# Altium PCB f1_hw_tst.PcbDoc
Units mil, origin at the board's own origin, x right, y up, seen from the top; angles counter-clockwise.
Board outline 3250 x 1655 mil, 2 copper layers (Top Layer, Bottom Layer); 28 components, 40 nets, 129 pads, 4 vias.
Unrouted connection lines stored in the file: 1.
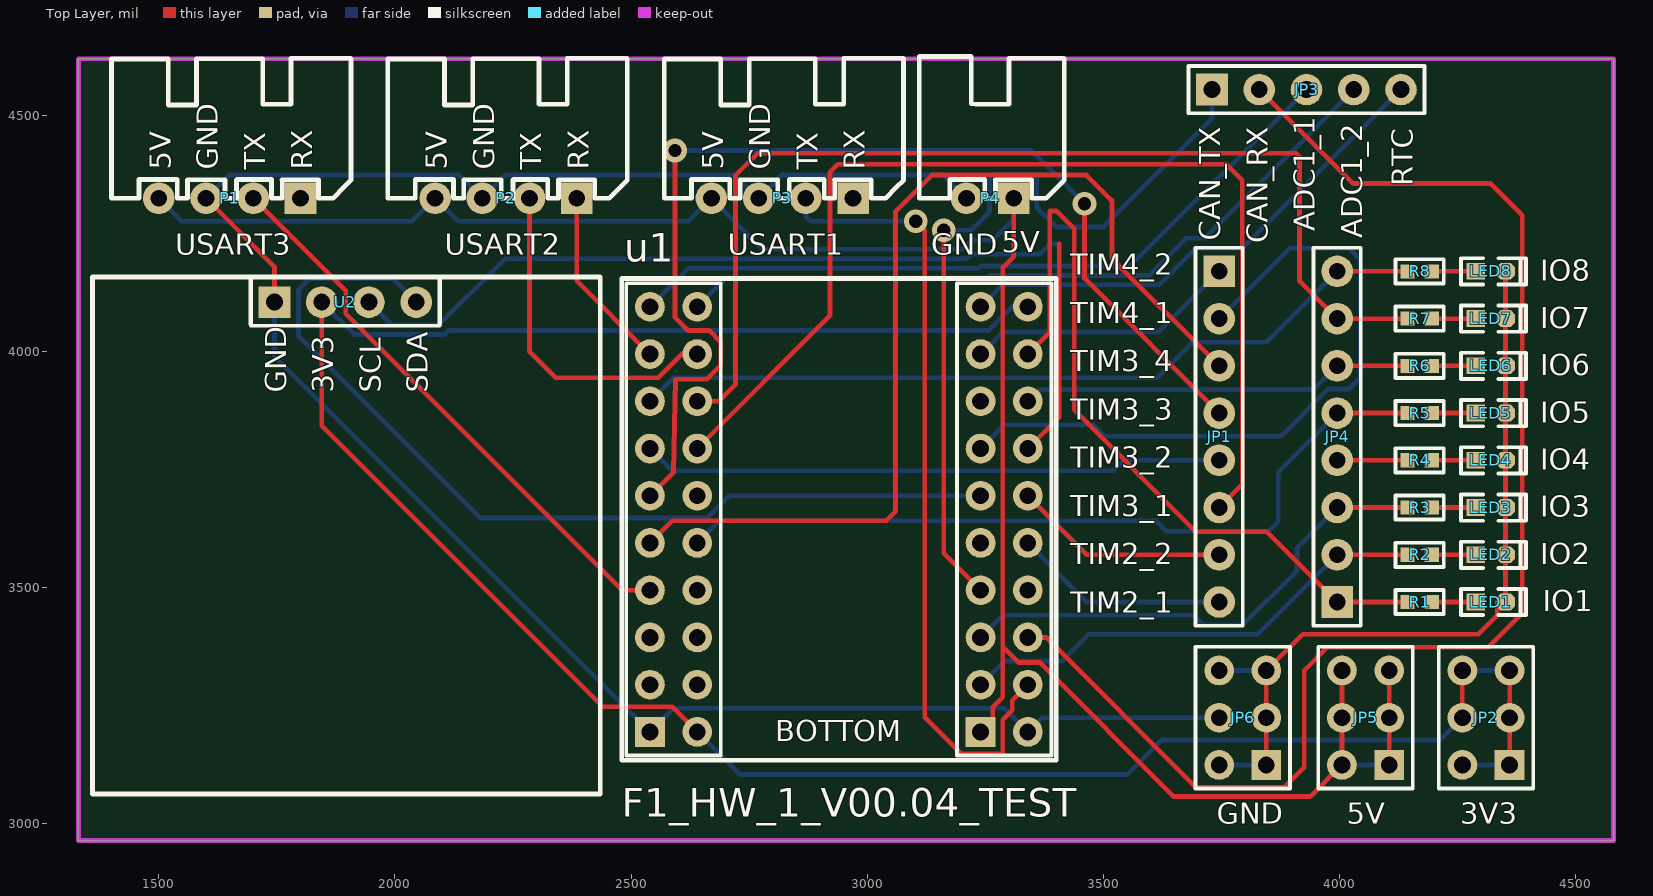
[diagram p0: Top Layer view]
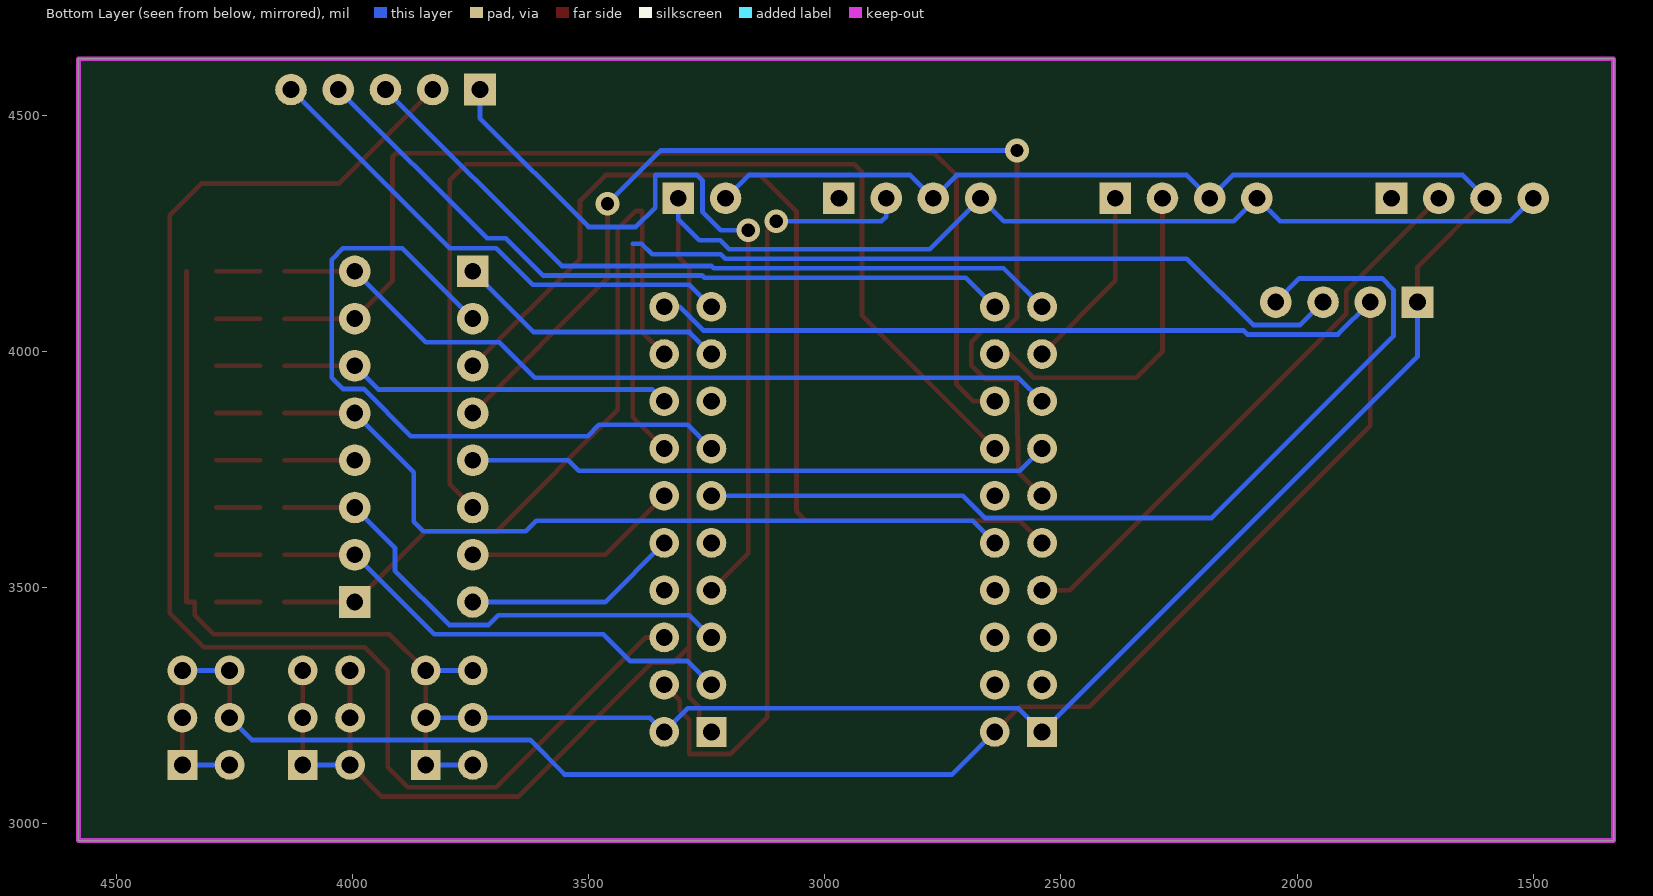
[diagram p1: Bottom Layer view, seen from below]

## Layer stack, top to bottom
Top Solder: solder mask 0.4, Solder Resist, Dk 3.5
Top Layer: signal copper 1.4
Dielectric 1: dielectric 12.6, FR-4, Dk 4.8
Bottom Layer: signal copper 1.4
Bottom Solder: solder mask 0.4, Solder Resist, Dk 3.5

## Board outline
1330,2965 1330,4620 4580,4620 4580,2965

## Design rules (kind name [scope] priority, off if disabled: settings)
Clearance [All] p1: gap=10 ignorepadtopadclearanceinfootprint=FALSE
PolygonConnect [All] p1: connectstyle=Relief reliefconductorwidth=10 reliefentries=4 polygonreliefangle="90 Angle" airgapwidth=10
RoutingVias [All] p1: holewidth=28 width=50 viastyle="Through Hole" minholewidth=28 minwidth=50 maxholewidth=28 maxwidth=50
SolderMaskExpansion [All] p1: expansion=4 istentingtop=FALSE
SupplyNets "Schematic Supply Nets_2" [InNet('5V')] p1: voltage=0.000
SupplyNets "Schematic Supply Nets_1" [InNet('3V3')] p2: voltage=0.000
SupplyNets "Schematic Supply Nets" [InNet('GND')] p3: voltage=0.000
Width [All] p1: maxlimit=10 minlimit=10 preferedwidth=10
30 further rules are at their usual default settings.

## Components (designator, comment, footprint, x,y, rotation, side; value= is the part's Value field where it differs from the comment)
JP1 "HDR-1X8" HDR2.54-LI-8P 3745,3820 r270 top
JP2 "Header3X2" HDR2.54-LI-2x3P 4310,3225 r90 top
JP3 "HDR-1X5" HDR2.54-LI-5P 3930,4555 r0 top
JP4 "HDR-1X8" HDR2.54-LI-8P 3995,3820 r90 top
JP5 "Header3X2" HDR2.54-LI-2x3P 4055,3225 r90 top
JP6 "Header3X2" HDR2.54-LI-2x3P 3795,3225 r90 top
LED1 "Colour" "LED 0603R" 4320,3470 r0 top
LED2 "Colour" "LED 0603R" 4320,3570 r0 top
LED3 "Colour" "LED 0603R" 4320,3670 r0 top
LED4 "Colour" "LED 0603R" 4320,3770 r0 top
LED5 "Colour" "LED 0603R" 4320,3870 r0 top
LED6 "Colour" "LED 0603R" 4320,3970 r0 top
LED7 "Colour" "LED 0603R" 4320,4070 r0 top
LED8 "Colour" "LED 0603R" 4320,4170 r0 top
P1 "port_uart_4p" XH2.54_4P 1655,4480 r0 top
P2 "port_uart_4p" XH2.54_4P 2240,4480 r0 top
P3 "port_uart_4p" XH2.54_4P 2825,4480 r0 top
P4 "port_mot_2p" XH2.54_2P 3255,4450 r0 top
R1 "2K" "R 0603_L" 4169.41,3470 r0 top
R2 "2K" "R 0603_L" 4169.41,3570 r0 top
R3 "2K" "R 0603_L" 4169.41,3670 r0 top
R4 "2K" "R 0603_L" 4169.41,3770 r0 top
R5 "2K" "R 0603_L" 4169.41,3870 r0 top
R6 "2K" "R 0603_L" 4169.41,3970 r0 top
R7 "2K" "R 0603_L" 4169.41,4070 r0 top
R8 "2K" "R 0603_L" 4169.41,4170 r0 top
u1 "f1_hw_1" f1_hw_1 2925,3635 r0 top
U2 "mod_oled" mod_oled 1899.91,4103.15 r0 top

## Footprints (in the part's own frame and the unit in brackets; to place one, negate y for a bottom-side part, rotate by r counter-clockwise, add the part's x,y. Pads: shape width x height; smd on the part's side, far side on the other; paste and mask are expansions set on the pad)
f1_hw_1 [mm] "f1_hw_1"
  rect 1.6x1.6 hole 0.9: 1(-9.779,-11.176) 21(8.001,-11.176)
  round 1.6 hole 0.9: 2(-7.239,-11.176) 3(-9.779,-8.636) 4(-7.239,-8.636) 5(-9.779,-6.096) 6(-7.239,-6.096) 7(-9.779,-3.556) 8(-7.239,-3.556) 9(-9.779,-1.016) 10(-7.239,-1.016) 11(-9.779,1.524) 12(-7.239,1.524) 13(-9.779,4.064) 14(-7.239,4.064) 15(-9.779,6.604) 16(-7.239,6.604) 17(-9.779,9.144) 18(-7.239,9.144) 19(-9.779,11.684) 20(-7.239,11.684) 22(10.541,-11.176) 23(8.001,-8.636) 24(10.541,-8.636) 25(8.001,-6.096) 26(10.541,-6.096) 27(8.001,-3.556) 28(10.541,-3.556) 29(8.001,-1.016) 30(10.541,-1.016) 31(8.001,1.524) 32(10.541,1.524) 33(8.001,4.064) 34(10.541,4.064) 35(8.001,6.604) 36(10.541,6.604) 37(8.001,9.144) 38(10.541,9.144) 39(8.001,11.684) 40(10.541,11.684)
  silkscreen extent -11.3,-12.7 12.06,13.21, body extent -11.3,-12.7 12.06,13.21, height 8.5
HDR2.54-LI-2x3P [mm] "双排排针，3x2脚"
  rect 1.6x1.6 hole 0.9: 1(-2.54,-1.27)
  round 1.6 hole 0.9: 2(-2.54,1.27) 3(0,-1.27) 4(0,1.27) 5(2.54,-1.27) 6(2.54,1.27)
  silkscreen extent -3.81,-2.54 3.81,2.54, body extent -3.81,-2.54 3.81,2.54, height 8.5
HDR2.54-LI-5P [mm] "排针，5脚"
  rect 1.7x1.7 hole 0.9: 1(-5.08,0)
  round 1.7 hole 0.9: 2(-2.54,0) 3(0,0) 4(2.54,0) 5(5.08,0)
  silkscreen extent -6.35,-1.27 6.35,1.27, body extent -6.35,-1.27 6.35,1.27, height 8.5
HDR2.54-LI-8P [mm] "排针，8脚"
  rect 1.7x1.7 hole 0.9: 1(-8.89,0)
  round 1.7 hole 0.9: 2(-6.35,0) 3(-3.81,0) 4(-1.27,0) 5(1.27,0) 6(3.81,0) 7(6.35,0) 8(8.89,0)
  silkscreen extent -10.16,-1.27 10.16,1.27, body extent -10.16,-1.27 10.16,1.27, height 8.5
"LED 0603R" [mm] "红色0603LED"
  rect 1x0.9 smd: 1(-0.8,0)
  oct 1x0.9 smd: 2(0.8,0)
  silkscreen extent -1.6,-0.7 1.9,0.7, body extent -0.8,-0.4 0.8,0.4, height 0.61
mod_oled [mm] "外购屏幕模块接口"
  rect 1.7x1.7 hole 0.9: 1(-3.935,0.047)
  round 1.7 hole 0.9: 2(-1.395,0.047) 3(1.145,0.047) 4(3.685,0.047)
  silkscreen extent -13.72,-26.4 13.58,1.4, body extent -13.72,-26.42 13.59,1.4, height 8.5
"R 0603_L" [mil] "1/10W贴片电阻"
  rect 30x30 smd: 1(-25.59,0) 2(25.59,0)
  silkscreen extent -51,-26 51,26, body extent -31,-16 31,16, height 16
XH2.54_2P [mm]
  rect 1.7x1.7 hole 0.9: 1(1.397,-3.175)
  round 1.7 hole 0.9: 2(-1.143,-3.175)
  silkscreen extent -3.68,-3.17 4.11,4.44, body extent -3.64,-3.52 3.9,4.17, height 5.73
XH2.54_4P [mm]
  rect 1.7x1.7 hole 0.9: 1(3.683,-3.937)
  round 1.7 hole 0.9: 2(1.143,-3.937) 3(-1.397,-3.937) 4(-3.937,-3.937)
  silkscreen extent -6.48,-3.94 6.4,3.59, body extent -6.44,-4.29 6.18,3.41, height 5.73

## Part data
JP1 JP4: library part "Header 8", "8P接插件", BOM名称=8P接插件, 学习资源=www.ooocke.com, 版权归属=源创客
JP2 JP5 JP6: library part "Header 3X2", "3*2P接插件", BOM名称=3*2P接插件, 学习资源=www.ooocke.com, 版权归属=源创客
JP3: library part "Header 5", "5P接插件", BOM名称=5P接插件, 学习资源=www.ooocke.com, 版权归属=源创客
LED1 LED2 LED3 LED4 LED5 LED6 LED7 LED8: library part LED-SMD, "贴片LED", BOM名称=贴片LED, 学习资源=www.ooocke.com, 版权归属=源创客
P1 P2 P3: "串口接口/SPP蓝牙模块 / XH2.54弯排针4p/4p排母"
P4: "开环直流电机接口 / XH2.54弯排针2p"
R1 R2 R3 R4 R5 R6 R7 R8: library part 电阻, "贴片电阻1%精度"
u1: "F103C8T6最小系统_1"
U2: "oled模块 / 4p排母"

## Via types
v1: diameter 50, hole 28, Top Layer to Bottom Layer, 4 vias

## Nets (pads, with @x,y where several pads share a name; then routed paths per layer and width w, separated by ;. In a path a pad name is that pad's centre, name@x,y a point inside that pad or via, vN(x,y) a via of type N, cw(c..) or ccw(c..) an arc to the next point about the centre after c; other vN are vias at no path point)
3V3: JP2.1 JP2.2 JP2.3 JP2.4 JP2.5 JP2.6 u1.2 u1.40 U2.2 | length 5080
  Top Layer w10: U2.2 1845,3843 2440,3248 2587,3248 u1.2 ; JP2.4 JP2.6 ; JP2.1 JP2.3 JP2.5
  Bottom Layer w10: U2.2 1913.47,4036.53 2105,4036.53 2113.47,4045 3257.01,4045 3307.01,4095 u1.40 ; u1.2 2730,3105 3551,3105 3624,3178 4213,3178 JP2.4 ; JP2.2 JP2.1 ; JP2.6 JP2.5
5V: JP5.1 JP5.2 JP5.3 JP5.4 JP5.5 JP5.6 P1.4 P2.4 P3.4 P4.1 u1.21 | length 4543.1
  Top Layer w10: u1.21 3265.55,3220.55 3265.55,3247.29 3287,3268.74 3287,3375 ; P4.1 3310,4201 3287,4178 3287,3375 ; JP5.6 JP5.4 JP5.2 3938,3058 3649,3058 3365,3342 3320,3342 3287,3375 ; JP5.1 JP5.3 JP5.5
  Bottom Layer w10: P1.4 1549,4276 2036,4276 P2.4 2134,4276 2621,4276 P3.4 2778,4217 3202,4217 3220.79,4235.79 3265.79,4235.79 3310,4280 P4.1 ; JP5.2 JP5.1
GND: JP6.1 JP6.2 JP6.3 JP6.4 JP6.5 JP6.6 LED1.2 LED2.2 LED3.2 LED4.2 LED5.2 LED6.2 LED7.2 LED8.2 P1.3 P2.3 P3.3 P4.2 u1.1 u1.22 U2.1 | length 6292.9
  Top Layer w10: P1.3 1745,4180 U2.1 ; JP6.1 JP6.3 JP6.5 3922,3402 4294,3402 4334,3442 4334,3470 LED1.2 LED2.2 LED3.2 LED4.2 LED5.2 LED6.2 LED7.2 LED8.2
  Bottom Layer w10: P1.3 1649,4374 2136,4374 P2.3 2234,4374 2721,4374 P3.3 2819,4374 3161,4374 P4.2 ; U2.1 1745,3990 u1.1 2590,3245 3290,3245 u1.22 3370,3225 JP6.4 JP6.3 ; JP6.2 JP6.1 ; JP6.6 JP6.5
NetJP1_1: JP1.1 u1.37 | length 577.5
  Bottom Layer w10: u1.37 3286.5,4041.5 3616.5,4041.5 JP1.1
NetJP1_2: JP1.2 u1.33 | length 1506.7
  Bottom Layer w10: u1.33 3290,3845 3478,3845 3502,3821 3876,3821 3976,3921 4020,3921 4044,3945 4044,4195 4020,4219 3894,4219 JP1.2
NetJP1_3: JP1.3 u1.9 | length 2139
  Top Layer w10: u1.9 2587,3642 3040,3642 3060,3662 3060,4297 3137,4374 3464,4374 3518,4320 3518,4197 JP1.3
NetJP1_4: JP1.4 u1.11 | length 2371.6
  Top Layer w10: u1.11 2590,3745 2594,3941.5 2660,3941.5 2690,3971.5 2690,4020 2665,4045 2620,4045 2593,4072 v1(2593,4426) ; v1(3460,4313) 3460,4155 JP1.4
  Bottom Layer w10: v1(2593,4426) 3347,4426 v1(3460,4313)
NetJP1_5: JP1.5 u1.13 | length 1233.6
  Bottom Layer w10: u1.13 2587,3748 3521,3748 3543,3770 JP1.5
NetJP1_6: JP1.6 u1.14 | length 2308.8
  Top Layer w10: u1.14 2921,4076 2921,4380 2938,4397 3760,4397 3794,4363 3794,3719 JP1.6
NetJP1_7: JP1.7 u1.32 | length 456.8
  Top Layer w10: u1.32 3465,3570 JP1.7
NetJP1_8: JP1.8 u1.30 | length 456.8
  Bottom Layer w10: u1.30 3465,3470 JP1.8
NetJP3_1: JP3.1 u1.27 | length 1692.3
  Top Layer w10: v1(3162,4257) 3162,3573 u1.27
  Bottom Layer w10: v1(3162,4257) 3220,4257 3259,4296 3259,4363 3270,4374 3359,4374 3359,4305 3400,4264 3500,4264 3730,4494 JP3.1
NetJP3_2: JP3.2 u1.26 | length 2961
  Top Layer w10: u1.26 3378.76,3395 3695.76,3078 3883,3078 3925,3120 3925,3325 3974,3374 4315,3374 4387,3446 4387,4289 4320,4356 4029,4356 JP3.2
NetJP3_3: JP3.3 u1.19 | length 1580.5
  Bottom Layer w10: u1.19 2621.53,4176.53 3234.88,4176.53 3239.84,4181.5 3556.5,4181.5 JP3.3
NetJP3_4: JP3.4 u1.20 | length 1580.5
  Bottom Layer w10: u1.20 2701.53,4156.53 3254.88,4156.53 3259.84,4161.5 3596.73,4161.5 3675.12,4239.88 3714.88,4239.88 JP3.4
NetJP3_5: JP3.5 u1.39 | length 1080.5
  Bottom Layer w10: u1.39 3286.5,4141.5 3618.5,4141.5 3696,4219 3794,4219 JP3.5
NetJP4_1: JP4.1 R1.1 u1.38 | length 1646.9
  Top Layer w10: u1.38 3386.5,4041.5 3386.5,4298 3400,4298 3438,4260 3438,3877 3696,3619 3846,3619 JP4.1 R1.1
NetJP4_2: JP4.2 R2.1 u1.23 | length 1017.7
  Top Layer w10: JP4.2 R2.1
  Bottom Layer w10: u1.23 3290,3345 3412,3345 3468.53,3401.53 3826.53,3401.53 JP4.2
NetJP4_3: JP4.3 R3.1 u1.25 | length 1063.1
  Top Layer w10: JP4.3 R3.1
  Bottom Layer w10: u1.25 3287,3442 3691,3442 3711.47,3421.53 3795,3421.53 3910,3536.53 3910,3585 JP4.3
NetJP4_4: JP4.4 R4.1 | length 148.8
  Top Layer w10: JP4.4 R4.1
NetJP4_5: JP4.5 R5.1 u1.10 | length 1697.5
  Top Layer w10: JP4.5 R5.1
  Bottom Layer w10: u1.10 2687,3642 3611,3642 3633,3620 3850,3620 3870,3640 3870,3745 JP4.5
NetJP4_6: JP4.6 R6.1 u1.36 | length 834.9
  Top Layer w10: JP4.6 R6.1
  Bottom Layer w10: u1.36 3365,3920 3945,3920 JP4.6
NetJP4_7: JP4.7 R7.1 u1.16 | length 2279.8
  Top Layer w10: u1.16 2686,3895 2721,3930 2721,4373 2768,4420 3908,4420 3915,4413 3915,4150 JP4.7 R7.1
NetJP4_8: JP4.8 R8.1 u1.15 | length 1717.7
  Top Layer w10: JP4.8 R8.1
  Bottom Layer w10: u1.15 2590,3945 3614,3945 3689,4020 3845,4020 JP4.8
NetLED1_1: LED1.1 R1.2 | length 93.5
  Top Layer w10: R1.2 LED1.1
NetLED2_1: LED2.1 R2.2 | length 93.5
  Top Layer w10: R2.2 LED2.1
NetLED3_1: LED3.1 R3.2 | length 93.5
  Top Layer w10: R3.2 LED3.1
NetLED4_1: LED4.1 R4.2 | length 93.5
  Top Layer w10: R4.2 LED4.1
NetLED5_1: LED5.1 R5.2 | length 93.5
  Top Layer w10: R5.2 LED5.1
NetLED6_1: LED6.1 R6.2 | length 93.5
  Top Layer w10: R6.2 LED6.1
NetLED7_1: LED7.1 R7.2 | length 93.5
  Top Layer w10: R7.2 LED7.1
NetLED8_1: LED8.1 R8.2 | length 93.5
  Top Layer w10: R8.2 LED8.1
NetP1_1: P1.1
NetP1_2: P1.2 u1.7 | length 1212.5
  Top Layer w10: P1.2 1896,4129 1896,4080 2481,3495 u1.7
NetP2_1: P2.1 u1.17 | length 394.2
  Top Layer w10: P2.1 2385,4150 u1.17
NetP2_2: P2.2 u1.18 | length 723.5
  Top Layer w10: P2.2 2285,4000 2340,3945 2557.01,3945 2607.01,3995 u1.18
NetP3_1: P3.1
NetP3_2: P3.2 u1.24 | length 1700
  Top Layer w10: v1(3102.53,4276) 3121.53,4257 3121.53,3226.47 3200,3148 3287,3148 3287,3221 3307,3241 3307,3262 u1.24
  Bottom Layer w10: P3.2 2870,4286 2880,4276 v1(3102.53,4276)
Netu1_31: u1.31 U2.4 | length 2000.6
  Bottom Layer w10: U2.4 1995,4155 1820,4155 1796,4131 1796,4033 2181,3648 2661,3648 2708,3695 u1.31
Netu1_34: u1.34 U2.3 | length 2014.2
  Top Layer w10: u1.34 3406.5,3861.5 3406.5,4228.73
  Bottom Layer w10: U2.3 1993.47,4056.53 2093,4056.53 2233.47,4197 3210.84,4197 3219.84,4206 3365.22,4206 3387.95,4228.73 3406.5,4228.73
pads on no net: u1.3 u1.4 u1.5 u1.6 u1.8 u1.12 u1.28 u1.29 u1.35

## Keep-outs
Keep-Out Layer:
  the board outline again, w10

## Silkscreen, mask and mechanical layers (free items; w line width, h text height)
Top Overlay:
  text "RTC" at 4155,4350 h45 r90
  text "ADC1_1" at 3947.5,4255 h45 r90
  text "ADC1_2" at 4047.5,4240 h45 r90
  text "CAN_TX" at 3747.5,4235 h45 r90
  text "CAN_RX" at 3847.5,4230 h45 r90
  text "5V" at 3285,4210 h45
  text "USART3" at 1535,4205 h45
  text "USART2" at 2105,4205 h45
  text "USART1" at 2705,4205 h45
  text "GND" at 3135,4205 h45
  text "TIM4_2" at 3430,4162.5 h45
  text "IO8" at 4425,4150 h45
  text "TIM4_1" at 3430,4060.35 h45
  text "IO7" at 4425,4050 h45
  text "TIM3_4" at 3430,3958.21 h45
  text "IO6" at 4425,3950 h45
  text "TIM3_3" at 3430,3856.07 h45
  text "IO5" at 4425,3850 h45
  text "TIM3_2" at 3430,3753.93 h45
  text "IO4" at 4425,3750 h45
  text "TIM3_1" at 3430,3651.78 h45
  text "IO3" at 4425,3650 h45
  text "TIM2_2" at 3430,3549.64 h45
  text "IO2" at 4425,3550 h45
  text "IO1" at 4430,3450 h45
  text "TIM2_1" at 3430,3447.5 h45
  text "F1_HW_1_V00.04_TEST" at 2480,3015 h60
  text "GND" at 3740,3000 h45
  text "5V" at 4015,3000 h45
  text "3V3" at 4255,3000 h45

## Text inside footprints (layer, text, board x,y; h text height)
P1: Top Overlay "RX" at 1825,4385 h45 r90; Top Overlay "TX" at 1725,4385 h45 r90; Top Overlay "GND" at 1625,4385 h45 r90; Top Overlay "5V" at 1525,4385 h45 r90
P2: Top Overlay "RX" at 2410,4385 h45 r90; Top Overlay "TX" at 2310,4385 h45 r90; Top Overlay "GND" at 2210,4385 h45 r90; Top Overlay "5V" at 2110,4385 h45 r90
P3: Top Overlay "RX" at 2995,4385 h45 r90; Top Overlay "TX" at 2895,4385 h45 r90; Top Overlay "GND" at 2795,4385 h45 r90; Top Overlay "5V" at 2695,4385 h45 r90
u1: Top Overlay "BOTTOM" at 2805,3175 h45
U2: Top Overlay "3V3" at 1869.91,3913.15 h45 r90; Top Overlay "SCL" at 1969.91,3913.15 h45 r90; Top Overlay "SDA" at 2069.91,3913.15 h45 r90; Top Overlay "GND" at 1769.91,3913.15 h45 r90